# Altium PCB ATmega2560_StepperDriver_Shield.PcbDoc
Units mil, origin at the board's own origin, x right, y up, seen from the top; angles counter-clockwise.
Board outline 4355.03 x 4325.03 mil, 2 copper layers (Top Layer, Bottom Layer); 8 components, 28 nets, 148 pads, 0 vias.
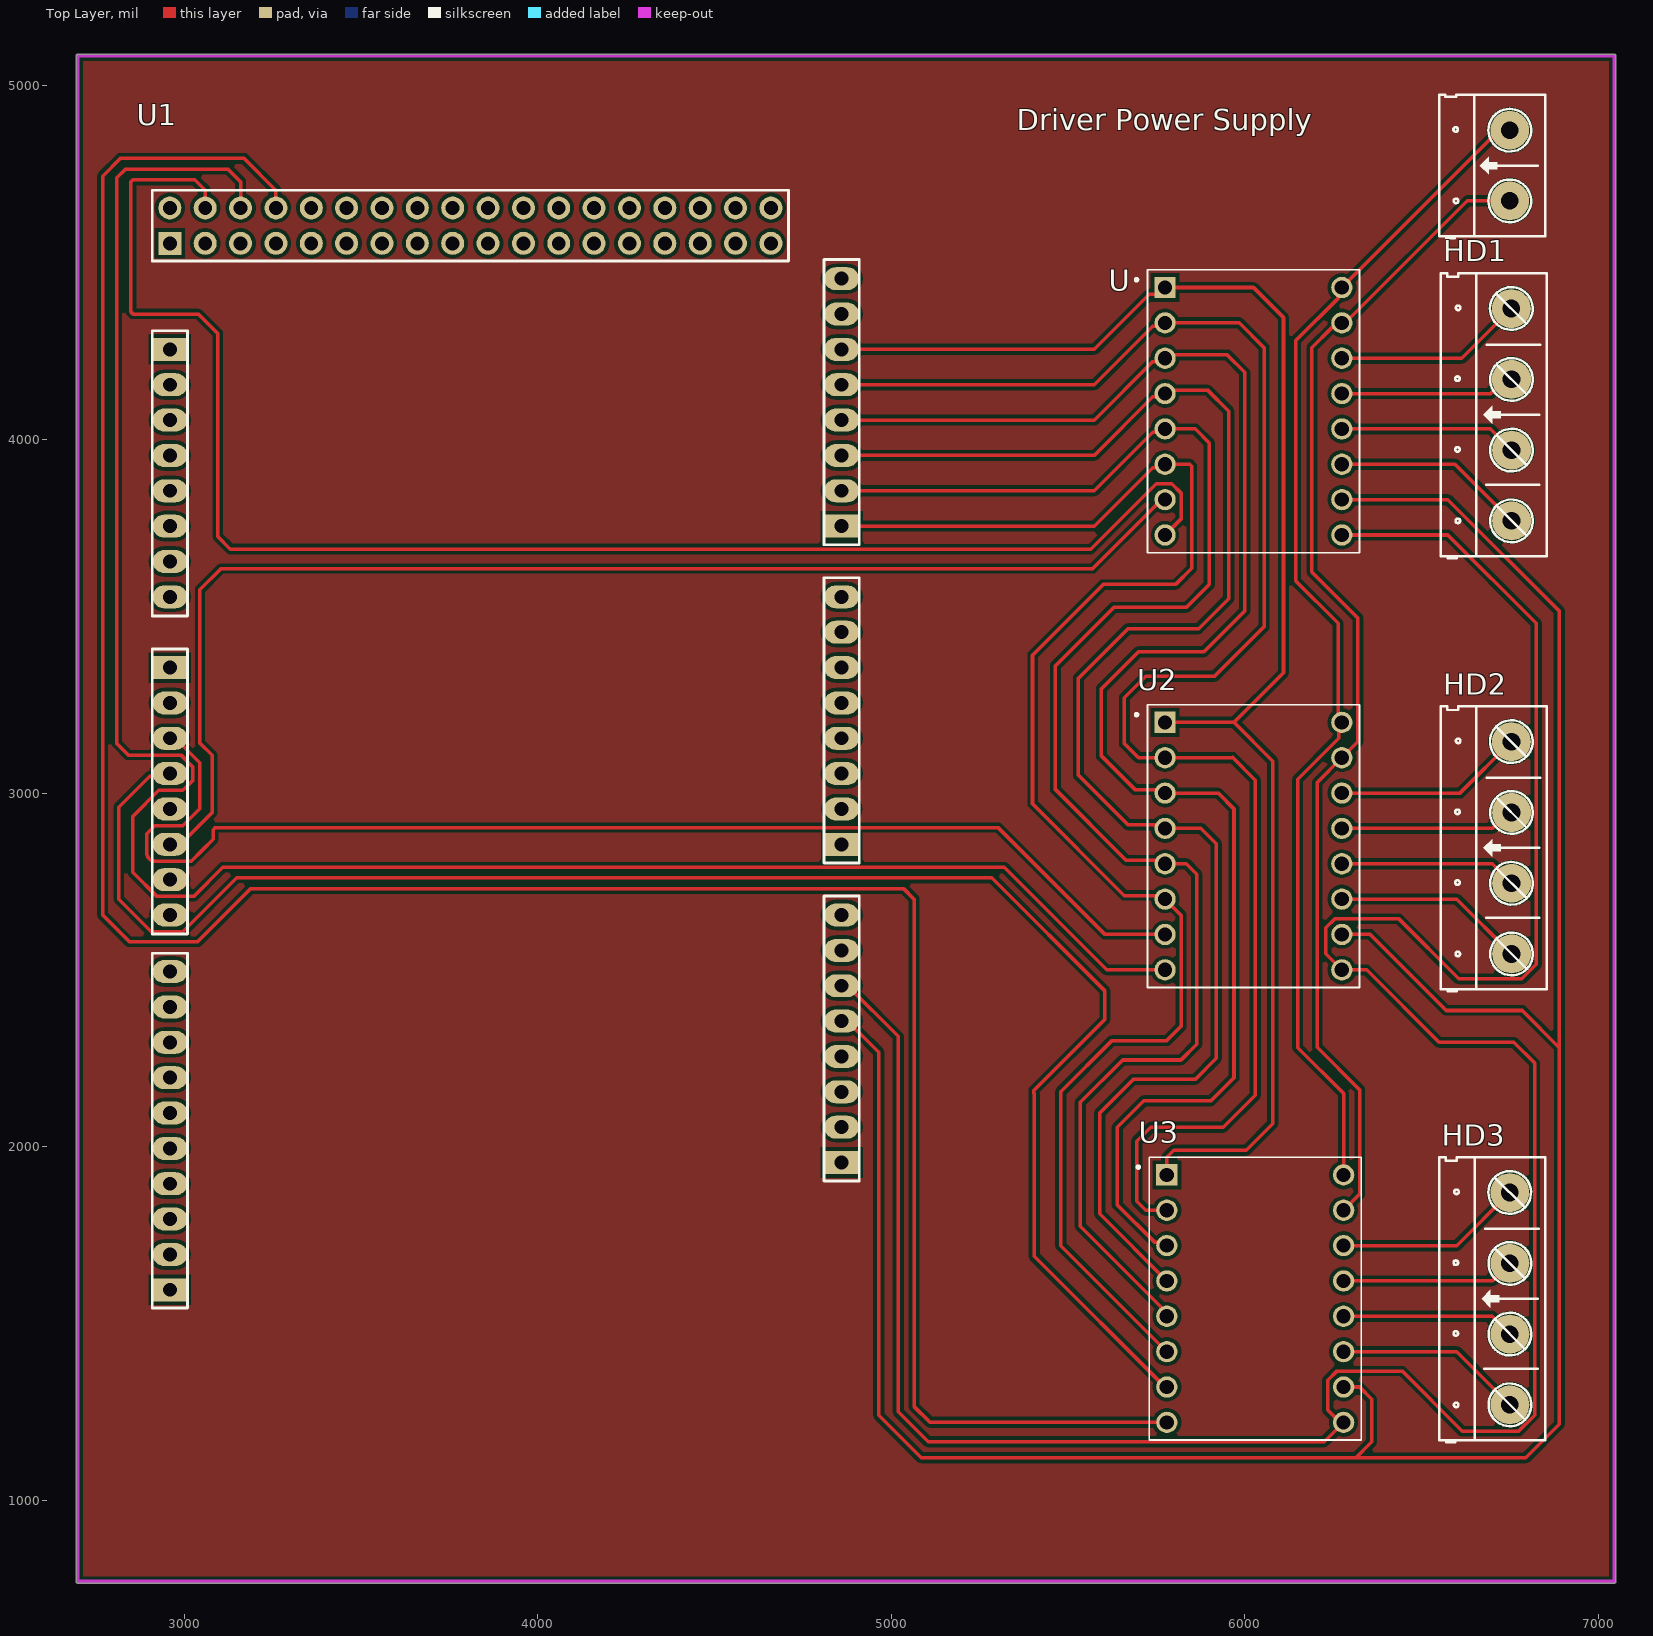
[diagram p0: Top Layer view]
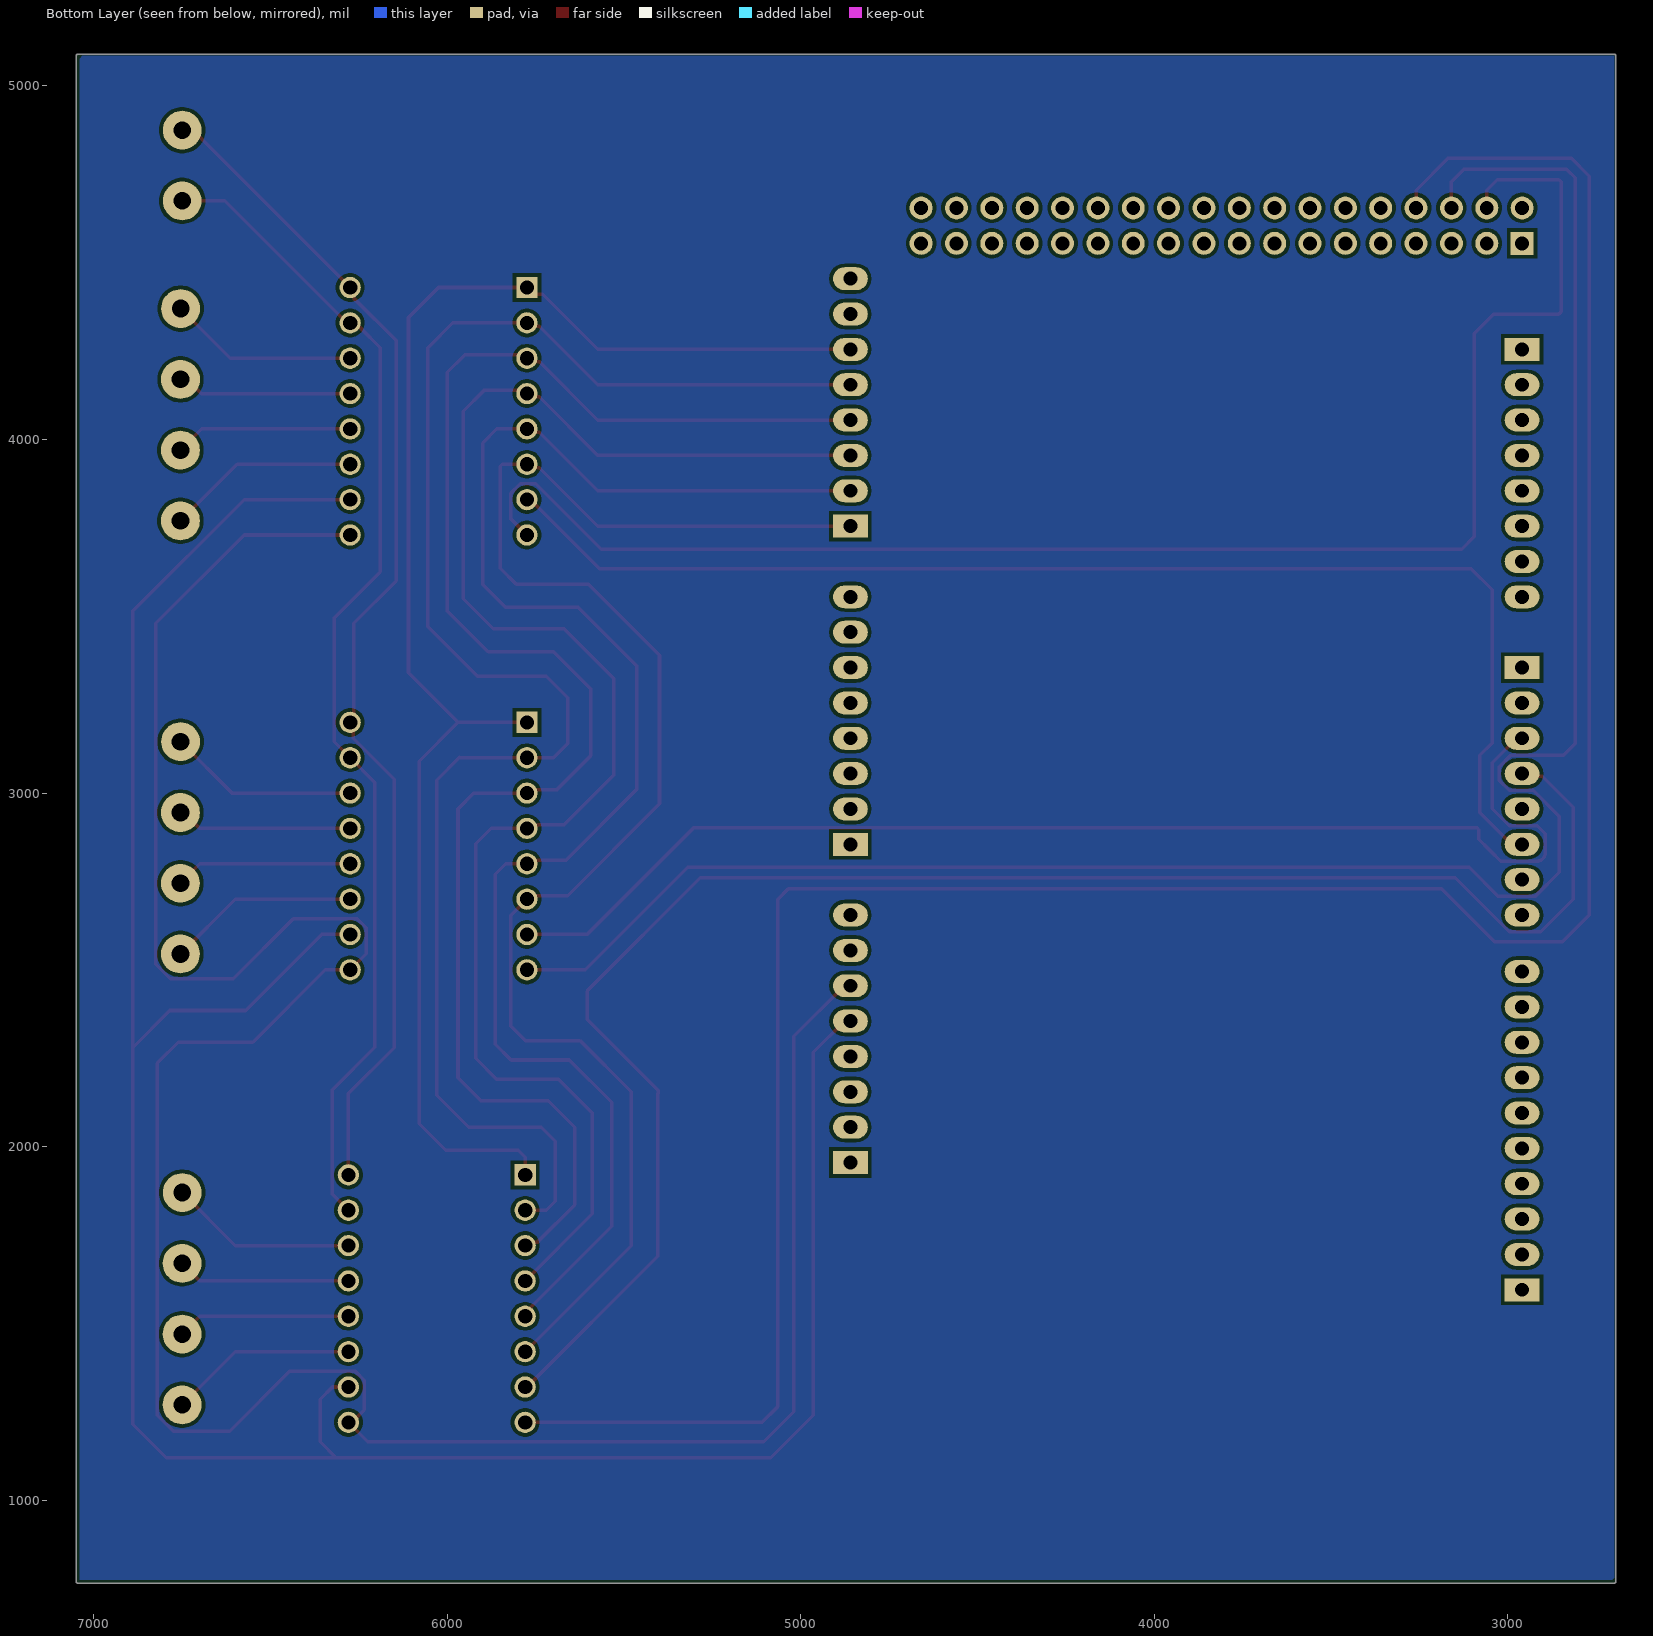
[diagram p1: Bottom Layer view, seen from below]

## Layer stack, top to bottom
Top Solder: solder mask 0.4, Solder Resist, Dk 3.5
Top Layer: signal copper 1.4
Dielectric 1: dielectric 12.6, FR-4, Dk 4.8
Bottom Layer: signal copper 1.4
Bottom Solder: solder mask 0.4, Solder Resist, Dk 3.5

## Board outline
2694.99,770 ccw(c2700,770) 2700,764.99 7045,764.99 ccw(c7045,770) 7050.02,770 7050.01,5085 ccw(c7045,5085) 7045,5090.02 2700,5090.02 ccw(c2700,5085) 2694.99,5085

## Design rules (kind name [scope] priority, off if disabled: settings)
Clearance [All] p1: gap=10 ignorepadtopadclearanceinfootprint=FALSE
PolygonConnect [All] p1: connectstyle=Relief reliefconductorwidth=10 reliefentries=4 polygonreliefangle="90 Angle" airgapwidth=10
RoutingVias [All] p1: holewidth=28 width=50 viastyle="Through Hole" minholewidth=28 minwidth=50 maxholewidth=28 maxwidth=50
SolderMaskExpansion [All] p1: expansion=4 istentingtop=FALSE
Width [All] p1: maxlimit=10 minlimit=10 preferedwidth=10
30 further rules are at their usual default settings.

## Components (designator, comment, footprint, x,y, rotation, side; value= is the part's Value field where it differs from the comment)
"Driver Power Supply" "Header 2" HED2 6750,4675 r90 top
HD1 "Header 4" HED4 6755,3770 r90 top
HD2 "Header 4" HED4 6755.06,2544.94 r90 top
HD3 "Header 4" HED4 6750.39,1269.61 r90 top
U "A4988" MODULE_A4988_STEPPER_MOTOR_DRIVER_CARRIER_BLACK 6025,4080 r0 top
U1 "Arduino Mega 2560" ARDUINO_MEGA_2560_03 4960,855 r90 top
U2 "A4988" MODULE_A4988_STEPPER_MOTOR_DRIVER_CARRIER_BLACK 6025,2850 r0 top
U3 "A4988" MODULE_A4988_STEPPER_MOTOR_DRIVER_CARRIER_BLACK 6030,1570 r0 top

## Footprints (in the part's own frame and the unit in brackets; to place one, negate y for a bottom-side part, rotate by r counter-clockwise, add the part's x,y. Pads: shape width x height; smd on the part's side, far side on the other; paste and mask are expansions set on the pad)
ARDUINO_MEGA_2560_03 [mm]
  oval 1.65x2.5 hole 1: 1(53.34,50.8) 3(60.96,50.8) 5(50.8,50.8) 6(58.42,50.8) 7(55.88,50.8) 12(76.2,50.8) 13(73.66,50.8) 15(48.26,50.8) 16(45.72,50.8) 17(41.656,50.8) 18(39.116,50.8) 23(36.576,50.8) 24(34.036,50.8) 25(31.496,50.8) 26(28.956,50.8) 30(33.02,2.54) 44(83.82,50.8) 45(81.28,50.8) 46(78.74,50.8) 63(71.12,50.8) 64(68.58,50.8) 82(91.44,2.54) 83(88.9,2.54) 84(86.36,2.54) 85(83.82,2.54) 86(81.28,2.54) 87(78.74,2.54) 88(76.2,2.54) 90(68.58,2.54) 91(66.04,2.54) 92(63.5,2.54) 93(60.96,2.54) 94(58.42,2.54) 95(55.88,2.54) 96(53.34,2.54) 98(23.876,50.8) 102(30.48,2.54) 103(35.56,2.54) 104(38.1,2.54) 105(40.64,2.54) 106(43.18,2.54) 107(45.72,2.54) 118(26.416,50.8) 120(21.336,50.8)
  rect 1.65x2.5 hole 1: 2(63.5,50.8) 43(86.36,50.8) 89(73.66,2.54) 97(50.8,2.54) 101(27.94,2.54) 119(18.796,50.8)
  round 1.65 hole 1: 19(96.52,10.16) 20(93.98,10.16) 21(96.52,12.7) 22(93.98,12.7) 35(96.52,15.24) 36(93.98,15.24) 37(96.52,17.78) 38(93.98,17.78) 39(96.52,20.32) 40(93.98,20.32) 41(96.52,22.86) 42(93.98,22.86) 50(93.98,27.94) 51(96.52,25.4) 52(93.98,25.4) 53(96.52,30.48) 54(93.98,30.48) 55(96.52,33.02) 56(93.98,33.02) 57(96.52,35.56) 58(93.98,35.56) 59(96.52,38.1) 60(93.98,38.1) 70(96.52,27.94) 71(96.52,40.64) 72(93.98,40.64) 73(96.52,43.18) 74(93.98,43.18) 75(96.52,45.72) 76(93.98,45.72) 77(96.52,48.26) 78(93.98,48.26) 114(93.98,7.62) 115(96.52,7.62) 117(96.52,50.8)
  rect 1.65x1.65 hole 1: 116(93.98,50.8)
  silkscreen extent 17.48,1.27 97.79,52.07, body extent 17.53,1.27 97.79,52.07, height 8.5
HED2 [mil] "Header 2, 2 pin, hight 300mil, Pin to Pin 200, Colour Green"
  round 110 hole 50: 1(0,0) 2(200,0)
  silkscreen extent -106,-100 300,200, body extent -92,-140 302,155, height 394
HED4 [mil] "Header 4, 4 pin, hight 300mil, Pin to Pin 200, Colour Green"
  round 110 hole 50: 1(0,0) 2(200,0) 3(400.06,0.06) 4(600.39,0.39)
  silkscreen extent -106,-100 700,200
MODULE_A4988_STEPPER_MOTOR_DRIVER_CARRIER_BLACK [mm]
  rect 1.53x1.53 hole 1.02: 1(-6.35,8.89)
  round 1.53 hole 1.02: 2(-6.35,6.35) 3(-6.35,3.81) 4(-6.35,1.27) 5(-6.35,-1.27) 6(-6.35,-3.81) 7(-6.35,-6.35) 8(-6.35,-8.89) 9(6.35,-8.89) 10(6.35,-6.35) 11(6.35,-3.81) 12(6.35,-1.27) 13(6.35,1.27) 14(6.35,3.81) 15(6.35,6.35) 16(6.35,8.89)
  silkscreen extent -8.5,-10.16 7.62,10.16

## Part data
"Driver Power Supply": library part Hed2, "Header 2 (Green)"
HD1 HD2 HD3: library part Hed4, "Header 4 (Green)"
U U2 U3: library part A4988_STEPPER_MOTOR_DRIVER_CARRIER_BLACK, "Stepper motor controler; IC: A4988; 1.2A; Uin mot: 8ÃƒÂ·35V", Package=None, Availability=Unavailable, MF=Pololu, MP="A4988 STEPPER MOTOR DRIVER CARRIER BLACK", Price=None, SnapEDA_Link=https://www.snapeda.com/parts/A4988%20STEPPER%20MOTOR%20DRIVER%20CARRIER%20BLACK/Pololu/view-part/1450050/?ref=snap
U1: library part "Arduino Mega 2560_03", ComponentLink1Description="Manufacturer Link", ComponentLink1URL=www.st.com/stm32, ComponentLink2Description=Datasheet, ComponentLink2URL=http://www.st.com/stonline/products/literature/ds/13587.pdf, DatasheetVersion="rev6, Mar-2008", PackageDescription="100-Pin Low-Profile Quad Flat Pack, 14 x 14 mm Body, 0.5 mm Pitch (LQFP100)", PackageReference=LQFP100, PackageVersion=Mar-2008, Published=30-May-2008, Publisher="Altium Limited"

## Nets (pads, with @x,y where several pads share a name; then routed paths per layer and width w, separated by ;. In a path a pad name is that pad's centre, name@x,y a point inside that pad or via, vN(x,y) a via of type N, cw(c..) or ccw(c..) an arc to the next point about the centre after c; other vN are vias at no path point)
DIR1: U1.77 U.8 | length 4452.5
  Top Layer w10: U1.77 3060,4705 3030,4735 2855.86,4735 2850,4729.14 2850,4360.86 2855.86,4355 3040,4355 3095,4300 3095,3725.86 3130.86,3690 5565,3690 5750.12,3875.12 5793.69,3875.12 5820.12,3848.69 5820.12,3775.12 U.8
DIR2: U1.75 U2.8 | length 5801.7
  Top Layer w10: U1.75 3160,4729.14 3124.14,4765 2835,4765 2810,4740 2810,3140 2842.48,3107.52 2991.36,3107.52 3024.21,3074.67 3024.21,3035.33 2996.4,3007.52 2928.64,3007.52 2855,2933.88 2855,2776.12 2923.6,2707.52 3027.52,2707.52 3110,2790 5320,2790 5610,2500 U2.8
DIR3: U1.73 U3.8 | length 7257.3
  Top Layer w10: U1.73 3260,4705 3170,4795 2820,4795 2770,4745 2770,2655 2845,2580 3039.14,2580 3189.14,2730 5035,2730 5065,2700 5065,1265 5110,1220 U3.8
ENABLE: U1.84 U2.1 U3.1 U.1 | length 4325.6
  Top Layer w10: U1.84 5575,4255 5730.74,4410.74 5755.74,4410.74 U.1 6025,4430 6110,4345 6110,3340 5970,3200 ; U2.1 5970,3200 ; U3.1 5780,1970 5800,1990 6005,1990 6080,2065 6080,3090 5970,3200
GND: U1.105 U2.9 U3.9 U.9 | length 7527.1
  Top Layer w10: U1.105 4876.73,2455 5020,2311.73 5020,1250 5105,1165 6225,1165 U3.9 6270,1220 6234.88,1255.12 6234.88,1338.69 6261.31,1365.12 6445.6,1365.12 6615.71,1195 6774.78,1195 6820.39,1240.61 6820.39,2236.32 6761.72,2295 6550,2295 6345,2500 U2.9 6229.88,2545.12 6229.88,2618.69 6256.31,2645.12 6435.09,2645.12 6605.27,2474.94 6784.06,2474.94 6825.06,2515.94 6825.06,3479.94 6575,3730 U.9
MS1: U1.85 U2.2 U3.2 U.2 | length 4653.7
  Top Layer w10: U1.85 5575,4155 5740.39,4320.39 5765.39,4320.39 U.2 5985,4330 6055,4260 6055,3470 5915,3330 5720,3330 5660,3270 5660,3140 5700,3100 U2.2 5965,3100 5965.86,3100.86 6030,3036.72 6030,2145 5940,2055 5735,2055 5695,2015 5695,1845 5720,1820 U3.2
MS2: U1.86 U2.3 U3.3 U.3 | length 4577.6
  Top Layer w10: U1.86 5575,4055 5740.6,4220.6 5765.6,4220.6 U.3 ; U3.3 5770.39,1729.61 5749.41,1729.61 5749.02,1730 5745,1730 5640,1835 5640,2055 5715,2130 5905,2130 5970,2195 5970,2955 5925,3000 U2.3 5765.39,3009.61 5744.41,3009.61 5744.02,3010 5690,3010 5595,3105 5595,3295 5700,3400 5885,3400 6000,3515 6000,4190 5950.86,4239.14 U.3@5784.14,4239.14
MS3: U1.87 U2.4 U3.4 U.4 | length 4531.5
  Top Layer w10: U1.87 5575,3955 5740.6,4120.6 5765.6,4120.6 U.4 ; U3.4 5590,1810 5590,2095 5685,2190 5860,2190 5920,2250 5920,2856.72 5875.86,2900.86 5875,2900 U2.4 5765.39,2909.61 5744.41,2909.61 5744.02,2910 5670,2910 5530,3050 5530,3325 5670,3465 5870,3465 5955,3550 5955,4080 5895,4140 5805.98,4140 5805.59,4139.61 U.4@5784.61,4139.61
"NetDriver Power Supply_1": "Driver Power Supply.1" U2.15 U3.15 U.15 | length 3341.9
  Top Layer w10: U3.15 6325.12,1865.12 6325.12,2161.19 6205,2281.31 6205,3030 U2.15 6320.12,3145.12 6320.12,3495.34 6190,3625.46 6190,4260 6245.6,4315.6 6247,4315.6 6261.41,4330 6285,4330 6630,4675 6750,4675
"NetDriver Power Supply_2": "Driver Power Supply.2" U2.16 U3.16 U.16 | length 3382.6
  Top Layer w10: U3.16 6280,2150 6150,2280 6150,3038.81 6266.08,3154.88 6266.08,3191.08 U2.16 6265.39,3209.61 6265.39,3230.59 6265,3230.98 6265,3480 6145,3600 6145,4280 6265.39,4400.39 6265.39,4420.39 6700.87,4855.87 6703.81,4855.87 6722.94,4875 6750,4875
NetHD1_1: HD1.1 U.11 | length 546.3
  Top Layer w10: U.11 6595,3930 HD1.1
NetHD1_2: HD1.2 U.12 | length 523.8
  Top Layer w10: U.12 6695,4030 HD1.2 HD1.2@6736.01,3970
NetHD1_3: HD1.3 U.13 | length 496.5
  Top Layer w10: U.13 6696.01,4130 6736.07,4170.06 HD1.3
NetHD1_4: HD1.4 U.14 | length 537.8
  Top Layer w10: U.14 6614.21,4230 HD1.4
NetHD2_1: HD2.1 U2.11 | length 544.3
  Top Layer w10: U2.11 6600,2700 HD2.1
NetHD2_2: HD2.2 U2.12 | length 502.9
  Top Layer w10: U2.12 6700,2800 HD2.2
NetHD2_3: HD2.3 U2.13 | length 498.6
  Top Layer w10: U2.13 6701.01,2900 6746.01,2945 HD2.3
NetHD2_4: HD2.4 U2.14 | length 539.9
  Top Layer w10: U2.14 6609.34,3000 HD2.4
NetHD3_1: HD3.1 U3.11 | length 532.7
  Top Layer w10: U3.11 6600,1420 HD3.1
NetHD3_2: HD3.2 U3.12 | length 503.9
  Top Layer w10: U3.12@6288.92,1511.08 U3.12 6700,1520 HD3.2
NetHD3_3: HD3.3 U3.13 | length 490.9
  Top Layer w10: U3.13 6700.66,1620 HD3.3
NetHD3_4: HD3.4 U3.14 | length 532.1
  Top Layer w10: U3.14 6600,1720 HD3.4
RESET: U1.88 U2.5 U3.5 U.5 | length 4493.6
  Top Layer w10: U1.88 5575,3855 5740.39,4020.39 5765.39,4020.39 U.5 5860,4030 5900,3990 5900,3590 5835,3525 5630,3525 5465,3360 5465,3010 5665.6,2809.4 5765.6,2809.4 U2.5 5835,2800 5865,2770 5865,2290 5820,2245 5655,2245 5535,2125 5535,1775 5780,1530 U3.5
SLEEP: U1.89 U2.6 U3.6 U.6 | length 4466.7
  Top Layer w10: U1.89 5575,3755 5740.6,3920.6 5765.6,3920.6 U.6 5844.14,3930 5850,3924.14 5850,3635.55 5804.45,3590 5600,3590 5400,3390 5400,2970 5660,2710 5744.02,2710 5744.41,2709.61 5765.39,2709.61 5820.12,2654.88 5820.12,2340.12 5780,2300 5625,2300 5480,2155 5480,1720 U3.6
STEP1: U1.5 U.7 | length 3637.4
  Top Layer w10: U1.5 2990,2855 3080,2945 3080,3106.57 3045,3141.57 3045,3575 3105,3635 5570,3635 5765,3830 U.7
STEP2: U1.6 U2.7 | length 3550.1
  Top Layer w10: U1.6 2975,3155 3044.21,3085.79 3044.21,2955.33 2996.4,2907.52 2917.52,2907.52 2895,2885 2895,2830 ccw(c2917.48,2830) 2917.48,2807.52 2976.73,2807.52 3020.98,2807.52 3052.27,2838.81 3082.9,2869.44 3082.9,2896.62 3088.76,2902.48 5302.52,2902.48 5605,2600 U2.7
STEP3: U1.7 U3.7 | length 4830.2
  Top Layer w10: U1.7 2953.06,3048.06 2903.06,3048.06 2815,2960 2815,2700 2907.48,2607.52 2996.4,2607.52 3148.88,2760 5285,2760 5605,2440 5605,2360 5404.14,2159.14 5404.14,2150.86 5405,2150 5405,1690 5775,1320 U3.7
VCC: U1.104 U2.10 U3.10 U.10 | length 7253.5
  Top Layer w10: U1.104 4876.73,2355 4965,2266.73 4965,1240 5085,1120 6315,1120 ; U2.10 6355,2600 6570,2385 6785,2385 6890,2280 ; U.10 6575,3830 6890,3515 6890,2280 ; U3.10 6325,1320 6360,1285 6360,1165 6315,1120 ; 6315,1120 6795,1120 6890,1215 6890,2280
pads on no net: U1.1 U1.2 U1.3 U1.12 U1.13 U1.15 U1.16 U1.17 U1.18 U1.19 U1.20 U1.21 U1.22 U1.23 U1.24 U1.25 U1.26 U1.30 U1.35 U1.36 U1.37 U1.38 U1.39 U1.40 U1.41 U1.42 U1.43 U1.44 U1.45 U1.46 U1.50 U1.51 U1.52 U1.53 U1.54 U1.55 U1.56 U1.57 U1.58 U1.59 U1.60 U1.63 U1.64 U1.70 U1.71 U1.72 U1.74 U1.76 U1.78 U1.82 U1.83 U1.90 U1.91 U1.92 U1.93 U1.94 U1.95 U1.96 U1.97 U1.98 U1.101 U1.102 U1.103 U1.106 U1.107 U1.114 U1.115 U1.116 U1.117 U1.118 U1.119 U1.120

## Polygon pours and split planes (outlines as drawn)
no net on Top Layer "NONET_L01_P000" (solid, pour order 0): 2700,5085 2700,770 7045,770 7045,5085
no net on Bottom Layer "NONET_L02_P002" (solid, pour order 2): 2700,5085 7032.55,5085 7040,5077.55 7040,775 2705,775 2700,780

## Keep-outs
Top Layer:
  lines w10: 2700,770 7045,770 7045,5085 2700,5085 2700,5040 2700,5025 2700,770